# Altium PCB PCB1.PcbDoc
Units mil, origin at the board's own origin, x right, y up, seen from the top; angles counter-clockwise.
Board outline 3596.64 x 2974.6 mil, 2 copper layers (Top Layer, Bottom Layer); 24 components, 37 nets, 114 pads, 2 vias.
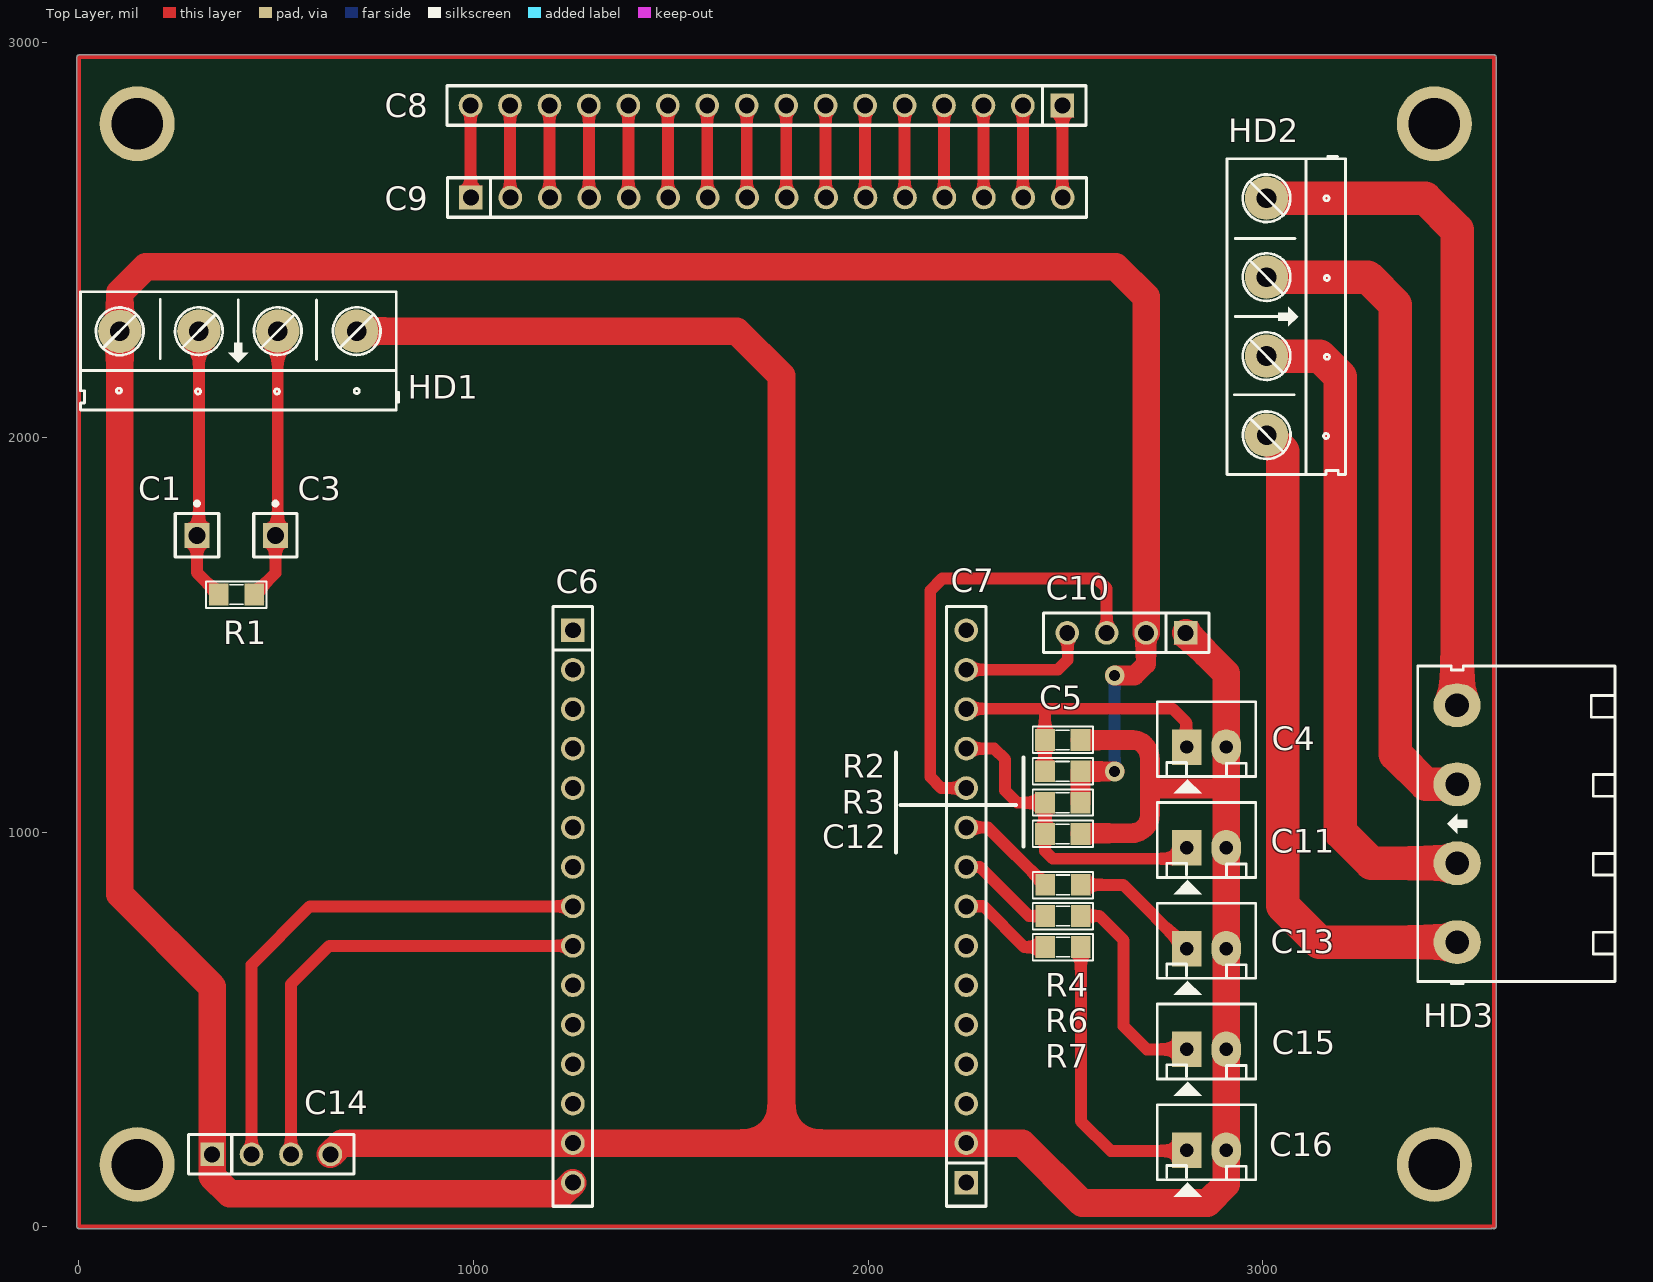
[diagram p0: Top Layer view]
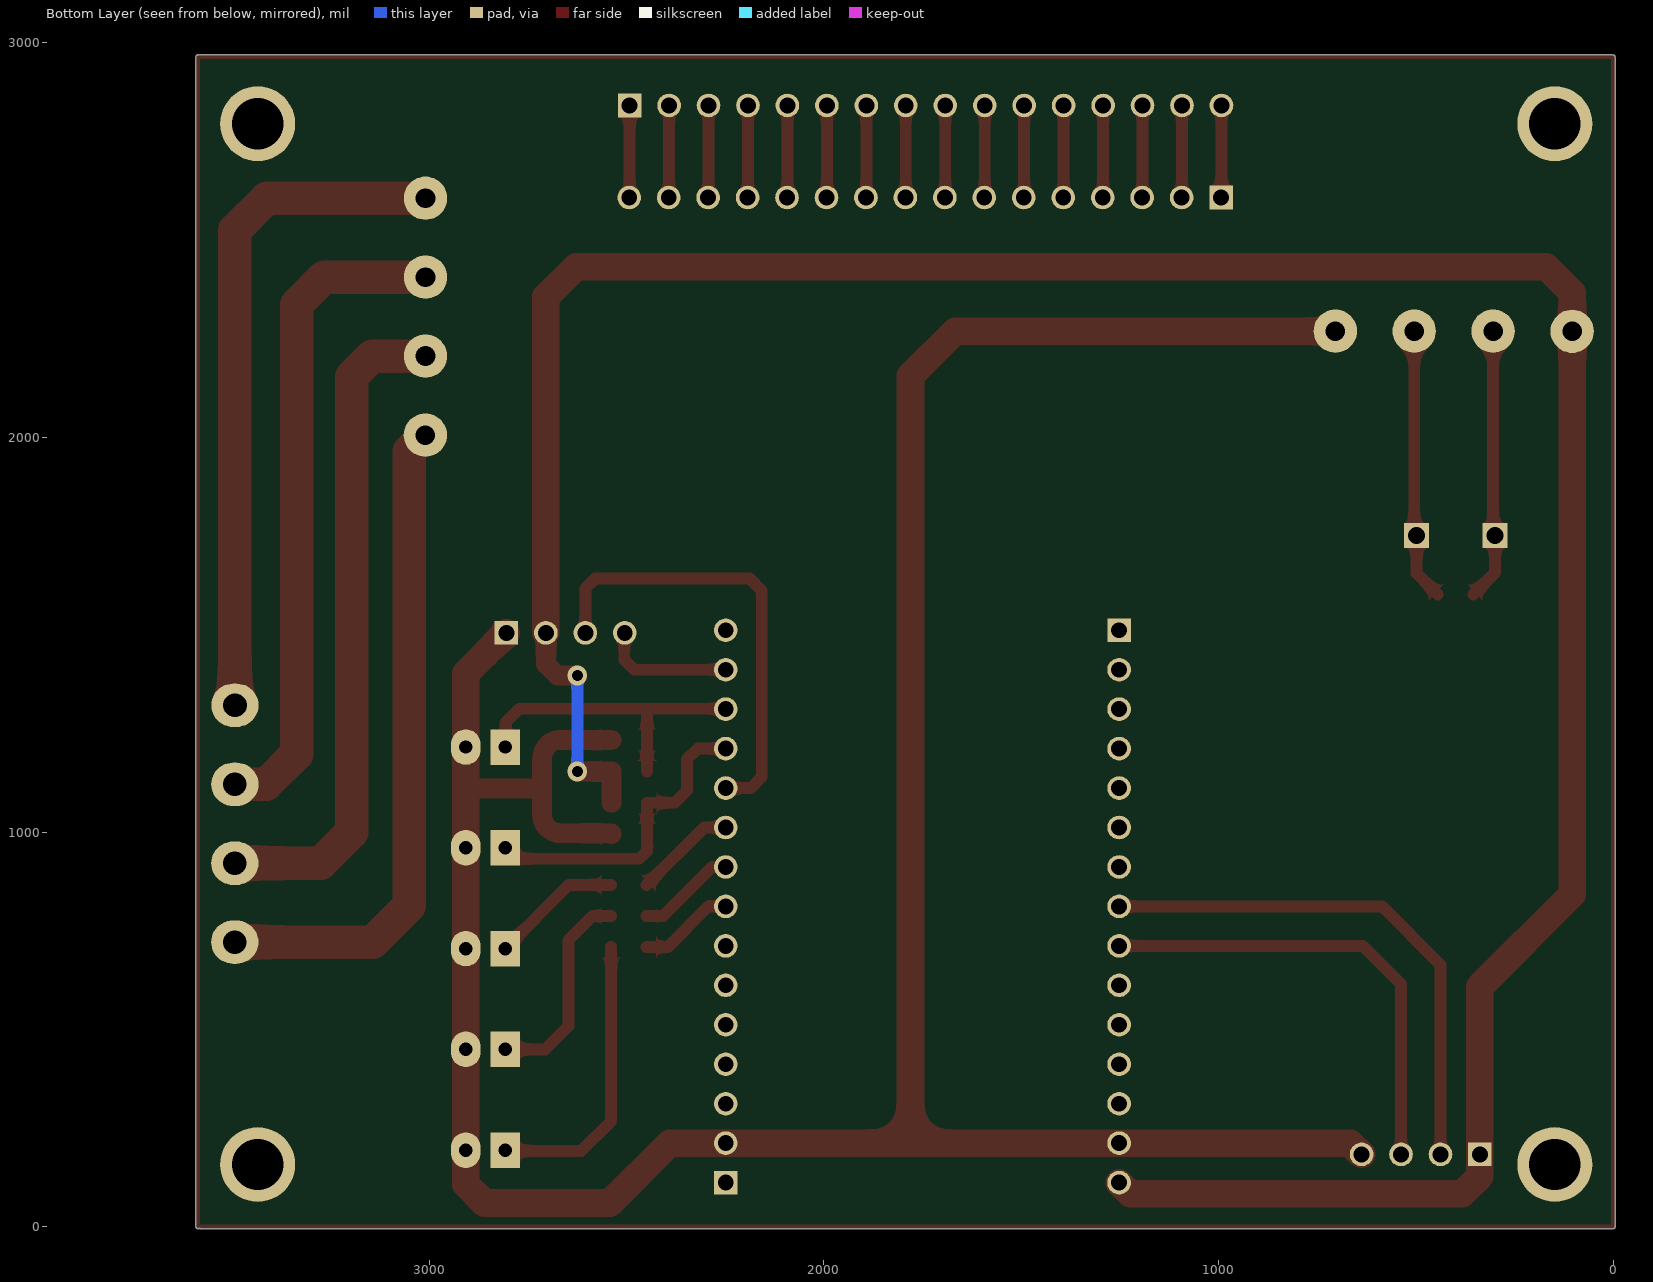
[diagram p1: Bottom Layer view, seen from below]

## Layer stack, top to bottom
Top Solder: solder mask 0.4, Solder Resist, Dk 3.5
Top Layer: signal copper 1.4
Dielectric 1: dielectric 12.6, FR-4, Dk 4.8
Bottom Layer: signal copper 1.4
Bottom Solder: solder mask 0.4, Solder Resist, Dk 3.5

## Board outline
-5.02,0 -5.02,2964.57 cw(c0,2964.57) 0,2969.58 3586.61,2969.58 cw(c3586.61,2964.57) 3591.63,2964.57 3591.63,0 cw(c3586.61,0) 3583.17,-3.64 cw(c3579.72,0) 3579.72,-5.02 0,-5.02 cw(c0,0)

## Design rules (kind name [scope] priority, off if disabled: settings)
Clearance [All] p1: gap=20 ignorepadtopadclearanceinfootprint=FALSE
PolygonConnect [All] p1: connectstyle=Relief reliefconductorwidth=10 reliefentries=4 polygonreliefangle="90 Angle" airgapwidth=10
RoomDefinition SCHEMATIC [InComponentClass('SCHEMATIC')] p1: confinementstyle=ConfineIn formatcopy=TRUE lockcomponents=FALSE outline 6291.06,-1203.78 13936.06,-1203.78 13936.06,936.22 6291.06,936.22
RoutingVias [All] p1: holewidth=28 width=50 viastyle="Through Hole" minholewidth=28 minwidth=50 maxholewidth=28 maxwidth=50
SolderMaskExpansion [All] p1: expansion=4
Width [All] p1: maxlimit=70 minlimit=30 preferedwidth=60
30 further rules are at their usual default settings.

## Components (designator, comment, footprint, x,y, rotation, side; value= is the part's Value field where it differs from the comment)
C1 "JP1" JP1-D1T 299.21,1751.97 r0 top
C3 "JP1" JP1-D1T 498.03,1751.97 r0 top
C4 "SW1" Header2 2807.76,1215.55 r0 top
C5 "100n" SM-0805 2493.39,1233.27 r180 top value=103
C6 "VI-EN" JP15-C1T 1251.97,1511.61 r270 top
C7 "3V3 - D23" JP15-C1T 2249.02,111.61 r90 top
C8 "I2C-TO-LCD" JP16-C1T 2492.52,2841.54 r180 top
C9 "JACK-LCD" JP16-C1T 993.5,2608.27 r0 top
C10 "I2C" JP4-C1T 2804.72,1504.92 r180 top
C11 "SW2" Header2 2807.76,960.14 r0 top
C12 "100n" SM-0805 2493.39,995.08 r180 top value=103
C13 "LED1" Header2 2807.76,704.72 r0 top
C14 "RS485" JP4-C1T 337.4,183.07 r0 top
C15 "LED2" Header2 2807.76,449.31 r0 top
C16 "LED3" Header2 2807.76,193.9 r0 top
HD1 "Header 4" HED4 703.94,2269.69 r180 top
HD2 "Header 4" HED4 3009.84,2606.5 r270 top
HD3 "Header 4" HED4T 3493.17,721 r90 top
R1 "120R" SM-RES-0805 354.33,1602.36 r0 top value="R1/4W - 1K"
R2 "10K" SM-RES-0805 2538.39,1153.87 r180 top value="R1/4W - 1K"
R3 "10K" SM-RES-0805 2538.39,1074.47 r180 top value="R1/4W - 1K"
R4 "330R" SM-RES-0805 2449.37,866.14 r0 top value="R1/4W - 1K"
R6 "330R" SM-RES-0805 2449.37,787.4 r0 top value="R1/4W - 1K"
R7 "330R" SM-RES-0805 2449.37,708.66 r0 top value="R1/4W - 1K"

## Footprints (in the part's own frame and the unit in brackets; to place one, negate y for a bottom-side part, rotate by r counter-clockwise, add the part's x,y. Pads: shape width x height; smd on the part's side, far side on the other; paste and mask are expansions set on the pad)
Header2 [mil] "CON2"
  rect 75x90 hole 34: 1(0,0)
  oval 75x90 hole 34: 2(100,0)
  silkscreen extent -75,-118 175,115, body extent -68,-70 168,107, height 236
HED4 [mil] "Header 4, 4 pin, hight 300mil, Pin to Pin 200, Colour Green"
  round 110 hole 50: 1(0,0) 2(200,0) 3(400.06,0.06) 4(600.39,0.39)
  silkscreen extent -106,-100 700,200
HED4T [mil] "Header 4, 4 pin, hight 300mil, Pin to Pin 200, Colour Green"
  oval 110x120 hole 60: 1(0,0) 2(200,0) 3(400.06,0.06) 4(600.39,0.39)
  silkscreen extent -105,-400 700,100, body extent -87,-406 690,66, height 334
JP1-D1T [mm] "1pins, 1 row, straight, gold plating"
  rect 1.6x1.6 hole 1.1: 1(0,0)
  silkscreen extent -1.4,-1.4 1.4,2.17, body extent -1.27,-1.27 1.27,1.27, height 8.54
JP4-C1T [mm] "4 row, straight, gold plating"
  rect 1.52x1.52 hole 1.02: 1(0,0)
  round 1.52 hole 1.02: 2(2.54,0) 3(5.08,0) 4(7.62,0)
  silkscreen extent -1.52,-1.27 9.14,1.27, body extent -1.52,-1.25 9.14,1.25, height 8.51
JP15-C1T [mm] "15 row, straight, gold plating"
  rect 1.52x1.52 hole 1.02: 1(0,0)
  round 1.52 hole 1.02: 2(2.54,0) 3(5.08,0) 4(7.62,0) 5(10.16,0) 6(12.7,0) 7(15.24,0) 8(17.78,0) 9(20.32,0) 10(22.86,0) 11(25.4,0) 12(27.94,0) 13(30.48,0) 14(33.02,0) 15(35.56,0)
  silkscreen extent -1.52,-1.27 37.08,1.27, body extent -1.52,-1.25 36.58,1.25, height 8.51
JP16-C1T [mm] "16 row, straight, gold plating"
  rect 1.52x1.52 hole 1.02: 1(0,0)
  round 1.52 hole 1.02: 2(2.54,0) 3(5.08,0) 4(7.62,0) 5(10.16,0) 6(12.7,0) 7(15.24,0) 8(17.78,0) 9(20.32,0) 10(22.86,0) 11(25.4,0) 12(27.94,0) 13(30.48,0) 14(33.02,0) 15(35.56,0) 16(38.1,0)
  silkscreen extent -1.52,-1.27 39.62,1.27, body extent -1.52,-1.25 39.62,1.25, height 8.51
SM-0805 [mil] "Compoment SMD 80x50mil"
  rect 50x55 smd: 1(-45,0) 2(45,0)
  silkscreen extent -77,-34 76,33, body extent -40,-27 40,23, height 24
SM-RES-0805 [mil]
  rect 50x55 smd: 1(0,0) 2(90,0)
  silkscreen extent -32,-34 121,33, body extent 6,-25 84,25, height 31

## Part data
C1 C3: "WR-PHD 2.54 mm Angled Socket Header", Manufacturer="Würth Elektronik eiSos GmbH", partNo=613002143121, ComponentLink1 Description=Manufacturer, ComponentLink1URL=http://www.we-online.com, ComponentLink2 Description=Datasheet, ComponentLink2URL=http://katalog.we-online.de/em/datasheet/6130xx143121.pdf, Created by="Karrer Zheng", Created Date="29 March 2013", NoPins=02
C4 C11 C13 C15 C16: library part Header2, "Header IDC, 2 x 1 Pin Vertical 2.54mm Pitch (Non-Boxed, Male)", Manufacturer="Würth Elektronik eiSos GmbH", partNo=613002143121, ComponentLink1 Description=Manufacturer, ComponentLink1URL=http://www.we-online.com, ComponentLink2 Description=Datasheet, ComponentLink2URL=http://katalog.we-online.de/em/datasheet/6130xx143121.pdf, Created by="Karrer Zheng", Created Date="29 March 2013", NoPins=02
C5 C12: library part CM, "Cap SMD"
C6 C7: library part JP15, "WR-PHD 2.54 mm Angled Socket Header", Manufacturer="Würth Elektronik eiSos GmbH", partNo=613015143121, ComponentLink1 Description=Manufacturer, ComponentLink1URL=http://www.we-online.com, ComponentLink2 Description=Datasheet, ComponentLink2URL=http://katalog.we-online.de/em/datasheet/6130xx143121.pdf, Created by="Karrer Zheng", Created Date="29 March 2013", NoPins=15
C8 C9: library part JP16, "WR-PHD 2.54 mm Angled Socket Header", Manufacturer="Würth Elektronik eiSos GmbH", partNo=613016143121, ComponentLink1 Description=Manufacturer, ComponentLink1URL=http://www.we-online.com, ComponentLink2 Description=Datasheet, ComponentLink2URL=http://katalog.we-online.de/em/datasheet/6130xx143121.pdf, Created by="Karrer Zheng", Created Date="29 March 2013", NoPins=16
C10 C14: library part JP4, "WR-PHD 2.54 mm Angled Socket Header", Manufacturer="Würth Elektronik eiSos GmbH", partNo=613004143121, ComponentLink1 Description=Manufacturer, ComponentLink1URL=http://www.we-online.com, ComponentLink2 Description=Datasheet, ComponentLink2URL=http://katalog.we-online.de/em/datasheet/6130xx143121.pdf, Created by="Karrer Zheng", Created Date="29 March 2013", NoPins=04
HD1 HD2 HD3: library part Hed4, "Header 4 (Green)"
R1 R2 R3 R4 R6 R7: library part R1/4W, "Resistor 1/4W"

## Free pads (board coordinates)
  round 190 hole 130: 4(147.64,157.48) 4(147.64,2795.28) 4(3435.04,157.48) 4(3435.04,2795.28)

## Via types
v1: diameter 50, hole 28, Top Layer to Bottom Layer, 2 vias

## Nets (pads, with @x,y where several pads share a name; then routed paths per layer and width w, separated by ;. In a path a pad name is that pad's centre, name@x,y a point inside that pad or via, vN(x,y) a via of type N, cw(c..) or ccw(c..) an arc to the next point about the centre after c; other vN are vias at no path point)
+5: C6.15 C10.2 C14.1 HD1.4 R2.1 R3.1 | length 7372.2
  Top Layer w30: v1@2624.67,1153.87 v1(2625,1153.54)
  Top Layer w50: R3.1 R2.1 v1@2624.67,1153.87 ; v1(2625,1396.65) 2675.2,1396.65 2704.72,1426.18 C10.2
  Top Layer w70: C6.15 1224.02,83.66 381.85,83.66 337.4,127.95 C14.1 337.4,608.46 103.54,842.32 HD1.4 103.54,2367.32 169.29,2433.07 2627.95,2433.07 2704.72,2356.3 C10.2
  Bottom Layer w30: v1(2625,1153.54) v1(2625,1396.65)
GND: C4.2 C5.1 C6.14 C7.2 C10.1 C11.2 C12.1 C13.2 C14.4 C15.2 C16.2 HD1.1 | length 7616.1
  Top Layer w30: 2905.79,1112.2 2907.76,1110.24
  Top Layer w50: C12.1 cw(c2540.35,995.08) 2540.35,997.05 2667.32,997.05 ccw(c2667.32,1044.29) 2714.57,1044.29 2714.57,1183.47 ccw(c2660.87,1183.47) 2698.84,1221.44 ccw(c2670.28,1192.87) 2670.28,1233.27 C5.1 ; 2715.55,1110.24 2903.82,1110.24 2905.79,1112.2
  Top Layer w70: C14.4 665.95,211.61 C6.14 1780.51,211.61 ; HD1.1 1667.32,2269.69 1780.51,2156.5 1780.51,211.61 ; C10.1 2907.76,1401.89 C4.2 2907.76,1110.24 C11.2 C13.2 C15.2 C16.2 2907.76,107.56 2860.2,60 2542.36,60 2390.75,211.61 C7.2 1780.51,211.61
NetC1_1: C1.1 HD1.3 R1.1 | length 698.6
  Top Layer w30: HD1.3@299.21,2264.96 HD1.3 303.88,1756.63 C1.1 299.21,1657.48 R1.1
NetC3_1: C3.1 HD1.2 R1.2 | length 692
  Top Layer w30: R1.2 498.03,1656.06 C3.1 503.94,1757.87 HD1.2
NetC4_1: C4.1 C5.2 C7.13 R2.2 | length 785.4
  Top Layer w30: C7.13@2266.73,1312.6 2445.87,1312.6 ; R2.2 C5.2 2448.39,1310.08 2445.87,1312.6 ; C4.1@2823.5,1213.58 2806.1,1230.98 2806.1,1278.54 2772.05,1312.6 2445.87,1312.6
NetC6_8: C6.8 C14.2 | length 1356.5
  Top Layer w30: C14.2 437.4,663.78 585.24,811.61 C6.8
NetC6_9: C6.9 C14.3 | length 1186
  Top Layer w30: C14.3 537.4,614.17 634.84,711.61 C6.9
NetC7_7: C7.7
NetC7_8: C7.8 R7.1 | length 243
  Top Layer w30: C7.8 2292.72,811.61 2395.67,708.66 R7.1
NetC7_9: C7.9 R6.1 | length 251.8
  Top Layer w30: C7.9 2283.27,911.61 2407.48,787.4 R6.1
NetC7_10: C7.10 R4.1 | length 260.6
  Top Layer w30: C7.10 2303.9,1011.61 R4.1
NetC7_11: C7.11 C10.3 | length 1158.7
  Top Layer w30: C7.11 2185.63,1111.61 2157.48,1139.76 2157.48,1612.2 2187.99,1642.72 2579.72,1642.72 2604.72,1617.72 C10.3
NetC7_12: C7.12 C11.1 C12.2 R3.2 | length 803.5
  Top Layer w30: C7.12 2319.88,1211.61 2347.44,1184.06 2347.44,1105.31 2378.28,1074.47 R3.2 C12.2 2448.39,952.2 2468.01,932.58 2780.2,932.58 C11.1
NetC7_14: C7.14 C10.4 | length 338.8
  Top Layer w30: C7.14 2481.1,1411.61 2505.91,1436.42 2505.91,1493.9 C10.4@2495.87,1503.94
NetC8_1: C8.1 C9.16 | length 233.7
  Top Layer w30: C8.1 2492.52,2609.25 C9.16
NetC8_2: C8.2 C9.15 | length 233.7
  Top Layer w30: C8.2 2392.52,2609.25 C9.15
NetC8_3: C8.3 C9.14 | length 233.7
  Top Layer w30: C8.3 2292.52,2609.25 C9.14
NetC8_4: C8.4 C9.13 | length 233.7
  Top Layer w30: C8.4 2192.52,2609.25 C9.13
NetC8_5: C8.5 C9.12 | length 233.7
  Top Layer w30: C8.5 2092.52,2609.25 C9.12
NetC8_6: C8.6 C9.11 | length 233.7
  Top Layer w30: C8.6 1992.52,2609.25 C9.11
NetC8_7: C8.7 C9.10 | length 233.7
  Top Layer w30: C8.7 1892.52,2609.25 C9.10
NetC8_8: C8.8 C9.9 | length 233.7
  Top Layer w30: C8.8 1792.52,2609.25 C9.9
NetC8_9: C8.9 C9.8 | length 233.7
  Top Layer w30: C8.9 1692.52,2609.25 C9.8
NetC8_10: C8.10 C9.7 | length 240.6
  Top Layer w30: C8.10@1585.63,2841.54 C8.10 1592.52,2609.25 C9.7
NetC8_11: C8.11 C9.6 | length 233.7
  Top Layer w30: C8.11 1492.52,2609.25 C9.6
NetC8_12: C8.12 C9.5 | length 233.7
  Top Layer w30: C8.12 1392.52,2609.25 C9.5
NetC8_13: C8.13 C9.4 | length 233.7
  Top Layer w30: C8.13 1292.52,2609.25 C9.4
NetC8_14: C8.14 C9.3 | length 233.7
  Top Layer w30: C8.14 1192.52,2609.25 C9.3
NetC8_15: C8.15 C9.2 | length 233.7
  Top Layer w30: C8.15 1092.52,2609.25 C9.2
NetC8_16: C8.16 C9.1 | length 233.7
  Top Layer w30: C8.16 992.52,2609.25 C9.1
NetC13_1: C13.1 R4.2 | length 335.2
  Top Layer w30: R4.2 2646.34,866.14 C13.1
NetC15_1: C15.1 R6.2 | length 535.8
  Top Layer w30: R6.2 2585.63,787.4 2647.64,725.39 2647.64,507.87 2706.2,449.31 C15.1
NetC16_1: C16.1 R7.2 | length 756.5
  Top Layer w30: R7.2 2539.37,267.72 2615.16,191.93 C16.1@2823.5,191.93
NetHD2_1: HD2.1 HD3.4 | length 1720.8
  Top Layer w85: HD2.1 3412.2,2606.5 3492.78,2525.92 HD3.4
NetHD2_2: HD2.2 HD3.3 | length 1682.8
  Top Layer w85: HD2.2 3266.73,2406.5 3336.61,2336.61 3336.61,1197.83 3413.39,1121.06 HD3.3
NetHD2_3: HD2.3 HD3.2 | length 1692
  Top Layer w85: HD2.3 3144.94,2206.43 3196.85,2154.53 3196.85,1000 3275.85,921 HD3.2
NetHD2_4: HD2.4 HD3.1 | length 1690.2
  Top Layer w85: HD2.4 3051.18,1965.16 3051.18,812.99 3143.17,721 HD3.1
pads on no net: C6.1 C6.2 C6.3 C6.4 C6.5 C6.6 C6.7 C6.10 C6.11 C6.12 C6.13 C7.1 C7.3 C7.4 C7.5 C7.6 C7.15
copper on no net: | length 13095.5
  Top Layer w10: 3579.72,0 2245.08,0 1229.33,0 0,0 0,2964.57 3586.61,2964.57 3586.61,0

## Other copper
Top Layer:
  region net +5: 103.54,2269.29
Bottom Layer:
  region: 2785.12,662.19
  region: 2785.12,662.19
  region: 2785.12,500.44

## Silkscreen, mask and mechanical layers (free items; w line width, h text height)
Top Overlay:
  lines w10: 2070.87,947.83 2070.87,1192.91 ; 2070.87,956.69 2070.87,1201.77 ; 2082.68,1068.9 2375,1068.9 ; 2393.5,963.39 2393.5,1188.98